# Altium PCB Near-E-Field-Probe.PcbDoc
Units mil, origin at the board's own origin, x right, y up, seen from the top; angles counter-clockwise.
Board outline 3953.32 x 549.98 mil, 4 copper layers (Top Layer, Layer 1, Layer 2, Bottom Layer), stack 61.811 mil thick; 1 components, 2 nets, 5 pads, 446 vias.
Unrouted connection lines stored in the file: 8.
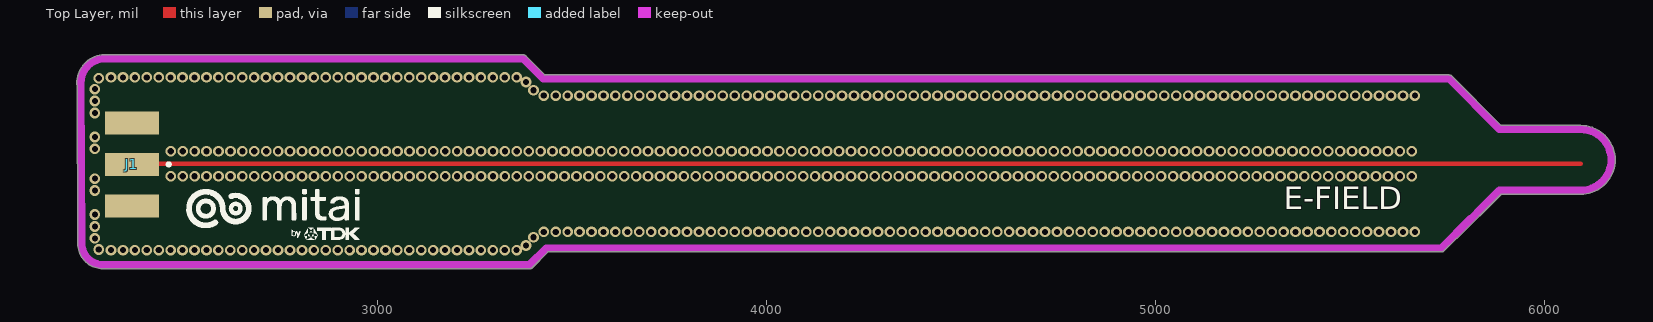
[diagram p0: Top Layer view]
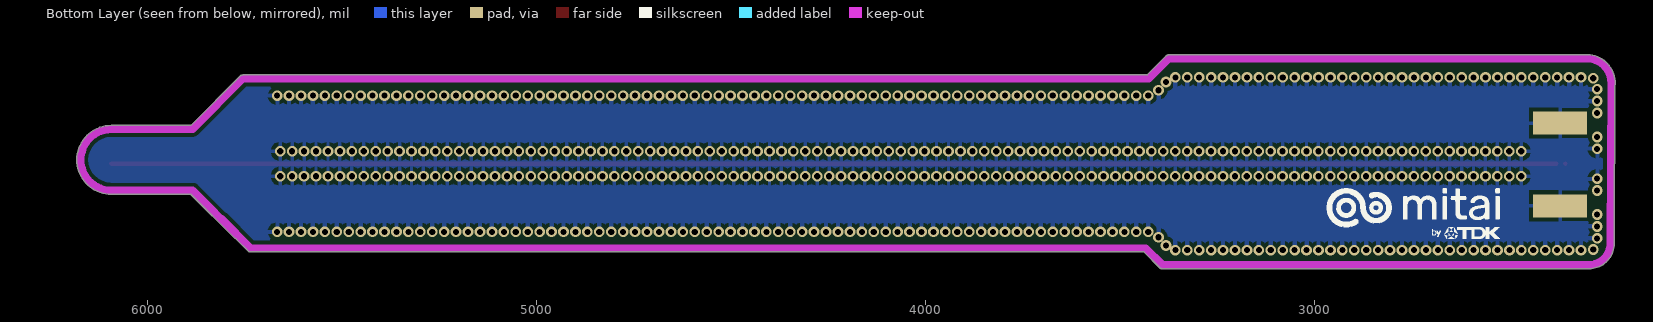
[diagram p1: Bottom Layer view, seen from below]

## Layer stack, top to bottom
Top Solder: solder mask 0.5, Solder Resist, Dk 3.5
Top Layer: signal copper 1.378
Dielectric 2: prepreg 7.874, PP-006, Dk 4.1
Layer 1: signal copper 0.689
Dielectric 1: dielectric 41.9291, FR-4, Dk 4.8
Layer 2: signal copper 0.689
Dielectric 3: prepreg 7.874, PP-006, Dk 4.1
Bottom Layer: signal copper 1.378
Bottom Solder: solder mask 0.5, Solder Resist, Dk 3.5

## Board outline
2300.67,3201.94 2684.47,3201.64 3391.5,3201.64 ccw(c3391.5,3211.5) 3398.47,3204.53 3398.46,3204.52 3439.08,3245.14 5735,3245.14 ccw(c5735,3255) 5741.97,3248.03 5741.96,3248.02 5771.28,3277.34 5775.09,3279.71 5888.71,3393.32 6091.41,3393.32 6093.06,3393.18 ccw(c6093.06,3481.78) 6181.66,3481.78 ccw(c6093.06,3481.78) 6093.14,3570.38 6093.06,3570.38 5888.57,3570.38 5761.95,3696.99 5761.96,3696.98 ccw(c5754.99,3690.01) 5754.99,3699.87 3432.23,3699.87 3431.35,3699.83 3382.45,3748.74 3382.46,3748.73 ccw(c3375.49,3741.76) 3375.49,3751.62 2293.65,3751.62 2292.48,3751.54 ccw(c2301.15,3679.24) 2228.78,3671.15 2230.8,3271.76 2230.8,3266.81 ccw(c2295.67,3266.81)

## Design rules (kind name [scope] priority, off if disabled: settings)
Clearance [All] p1: gap=10 ignorepadtopadclearanceinfootprint=FALSE except(0: Arc-Hole Track-Hole SMDPad-Hole THPad-Hole Via-Hole Fill-Hole Poly-Hole Region-Hole Text-Hole)
PolygonConnect [All] p1: connectstyle=Relief reliefconductorwidth=10 reliefentries=4 polygonreliefangle="90 Angle" airgapwidth=10
RoutingVias [All] p1: holewidth=28 width=50 viastyle="Through Hole" minholewidth=28 minwidth=50 maxholewidth=28 maxwidth=50
SolderMaskExpansion [All] p1: expansion=4 istentingtop=FALSE
Width [All] p1: maxlimit=10 minlimit=10 preferedwidth=10
30 further rules are at their usual default settings.

## Components (designator, comment, footprint, x,y, rotation, side; value= is the part's Value field where it differs from the comment)
J1 "CON-SMA-EDGE-S" RFSOLUTIONS_CON-SMA-EDGE-S 2370,3470 r0 top

## Footprints (in the part's own frame and the unit in brackets; to place one, negate y for a bottom-side part, rotate by r counter-clockwise, add the part's x,y. Pads: shape width x height; smd on the part's side, far side on the other; paste and mask are expansions set on the pad)
RFSOLUTIONS_CON-SMA-EDGE-S [mm]
  rect 3.5x1.5 smd: 1(0,0) G1(0,2.7) G2(0,-2.7)
  rect 3.5x1.5 smd far side: G3(0,2.7) G4(0,-2.7)
  silkscreen extent 2.3,-0.1 2.5,0.1, body extent -11.27,-3.17 2.06,3.17, height 3.55

## Part data
J1: "SMA Connector Jack, Female Socket - Board Edge, End Launch Solder", Package=None, Check_prices=https://www.snapeda.com/parts/CON-SMA-EDGE-S/RF+Solutions/view-part/?ref=eda, Digi-Key_Part_Number=CON-SMA-EDGE-S-ND, MF="RF Solutions", MP=CON-SMA-EDGE-S, Purchase-URL=https://pricing.snapeda.com/search/part/CON-SMA-EDGE-S/?ref=eda, SnapEDA_Link=https://www.snapeda.com/parts/CON-SMA-EDGE-S/RF+Solutions/view-part/?ref=snap

## Via types
v1: diameter 27.56, hole 15.75, Top Layer to Bottom Layer, tented both sides, 446 vias

## Nets (pads, with @x,y where several pads share a name; then routed paths per layer and width w, separated by ;. In a path a pad name is that pad's centre, name@x,y a point inside that pad or via, vN(x,y) a via of type N, cw(c..) or ccw(c..) an arc to the next point about the centre after c; other vN are vias at no path point)
GND: J1.G1 J1.G2 J1.G3 J1.G4
  other v1: 2316,3249.78 2346.67,3249.78 2377.33,3249.78 2408,3249.78 2438.66,3249.78 2469.33,3249.78 2500,3249.78 2530.66,3249.78 2561.33,3249.78 2592,3249.78 2622.66,3249.78 2653.33,3249.78 2684,3249.78 2714.66,3249.78 2745.33,3249.78 2776,3249.78 2806.66,3249.78 2837.33,3249.78 2868,3249.78 2898.66,3249.78 2929.33,3249.78 2960,3249.78 2990.66,3249.78 3021.33,3249.78 3052,3249.78 3082.66,3249.78 3113.33,3249.78 3113.33,3249.78 3144,3249.78 3174.66,3249.78 3205.33,3249.78 3236,3249.78 3266.66,3249.78 3297.33,3249.78 3328,3249.78 3358.66,3249.78 2284.48,3251.5 3382.66,3261.78 2274.66,3280.11 3401.66,3282.78 3428.33,3296.78 3459,3296.78 3489.66,3296.78 3520.33,3296.78 3551,3296.78 3581.66,3296.78 3612.33,3296.78 3643,3296.78 3673.66,3296.78 3704.33,3296.78 3735,3296.78 3765.66,3296.78 3796.33,3296.78 3826.99,3296.78 3857.66,3296.78 3888.33,3296.78 3918.99,3296.78 3949.66,3296.78 3980.33,3296.78 4010.99,3296.78 4041.66,3296.78 4072.33,3296.78 4102.99,3296.78 4133.66,3296.78 4164.33,3296.78 4194.99,3296.78 4225.66,3296.78 4256.33,3296.78 4286.99,3296.78 4317.66,3296.78 4348.33,3296.78 4378.99,3296.78 4409.66,3296.78 4440.33,3296.78 4470.99,3296.78 4501.66,3296.78 4532.33,3296.78 4562.99,3296.78 4593.66,3296.78 4624.33,3296.78 4654.99,3296.78 4685.66,3296.78 4716.33,3296.78 4746.99,3296.78 4777.66,3296.78 4808.33,3296.78 4838.99,3296.78 4869.66,3296.78 4900.33,3296.78 4930.99,3296.78 4961.66,3296.78 4992.33,3296.78 5022.99,3296.78 5053.66,3296.78 5084.33,3296.78 5114.99,3296.78 5145.66,3296.78 5176.33,3296.78 5206.99,3296.78 5237.66,3296.78 5268.33,3296.78 5298.99,3296.78 5329.66,3296.78 5360.32,3296.78 5390.99,3296.78 5421.66,3296.78 5452.32,3296.78 5482.99,3296.78 5513.66,3296.78 5544.32,3296.78 5574.99,3296.78 5605.66,3296.78 5636.32,3296.78 5666.99,3296.78 2274.66,3310.78 2274.66,3341.45 2274.66,3402.78 2274.66,3433.45 2469.66,3439.78 2500.33,3439.78 2531,3439.78 2561.66,3439.78 2592.33,3439.78 2623,3439.78 2653.66,3439.78 2684.33,3439.78 2715,3439.78 2745.66,3439.78 2776.33,3439.78 2807,3439.78 2837.66,3439.78 2868.33,3439.78 2899,3439.78 2929.66,3439.78 2960.33,3439.78 2991,3439.78 3021.66,3439.78 3052.33,3439.78 3083,3439.78 3113.66,3439.78 3144.33,3439.78 3175,3439.78 3205.66,3439.78 3236.33,3439.78 3267,3439.78 3297.66,3439.78 3328.33,3439.78 3359,3439.78 3389.66,3439.78 3420.33,3439.78 3451,3439.78 3481.66,3439.78 3512.33,3439.78 3543,3439.78 3573.66,3439.78 3604.33,3439.78 3635,3439.78 3665.66,3439.78 3696.33,3439.78 3727,3439.78 3757.66,3439.78 3788.33,3439.78 3818.99,3439.78 3849.66,3439.78 3880.33,3439.78 3910.99,3439.78 3941.66,3439.78 3972.33,3439.78 4002.99,3439.78 4033.66,3439.78 4064.33,3439.78 4094.99,3439.78 4125.66,3439.78 4156.33,3439.78 4186.99,3439.78 4217.66,3439.78 4248.33,3439.78 4278.99,3439.78 4309.66,3439.78 4340.33,3439.78 4370.99,3439.78 4401.66,3439.78 4432.33,3439.78 4462.99,3439.78 4493.66,3439.78 4524.33,3439.78 4554.99,3439.78 4585.66,3439.78 4616.33,3439.78 4646.99,3439.78 4677.66,3439.78 4708.33,3439.78 4738.99,3439.78 4769.66,3439.78 4800.33,3439.78 4830.99,3439.78 4861.66,3439.78 4892.33,3439.78 4922.99,3439.78 4953.66,3439.78 4984.33,3439.78 5014.99,3439.78 5045.66,3439.78 5076.33,3439.78 5106.99,3439.78 5137.66,3439.78 5168.33,3439.78 5198.99,3439.78 5229.66,3439.78 5260.33,3439.78 5290.99,3439.78 5321.66,3439.78 5352.32,3439.78 5382.99,3439.78 5413.66,3439.78 5444.32,3439.78 5474.99,3439.78 5505.66,3439.78 5536.32,3439.78 5566.99,3439.78 5597.66,3439.78 5628.32,3439.78 5658.99,3439.78 2469.66,3503.78 2500.33,3503.78 2531,3503.78 2561.66,3503.78 2592.33,3503.78 2623,3503.78 2653.66,3503.78 2684.33,3503.78 2715,3503.78 2745.66,3503.78 2776.33,3503.78 2807,3503.78 2837.66,3503.78 2868.33,3503.78 2899,3503.78 2929.66,3503.78 2960.33,3503.78 2991,3503.78 3021.66,3503.78 3052.33,3503.78 3083,3503.78 3113.66,3503.78 3144.33,3503.78 3175,3503.78 3205.66,3503.78 3236.33,3503.78 3267,3503.78 3297.66,3503.78 3328.33,3503.78 3359,3503.78 3389.66,3503.78 3420.33,3503.78 3451,3503.78 3481.66,3503.78 3512.33,3503.78 3543,3503.78 3573.66,3503.78 3604.33,3503.78 3635,3503.78 3665.66,3503.78 3696.33,3503.78 3727,3503.78 3757.66,3503.78 3788.33,3503.78 3818.99,3503.78 3849.66,3503.78 3880.33,3503.78 3910.99,3503.78 3941.66,3503.78 3972.33,3503.78 4002.99,3503.78 4033.66,3503.78 4064.33,3503.78 4094.99,3503.78 4125.66,3503.78 4156.33,3503.78 4186.99,3503.78 4217.66,3503.78 4248.33,3503.78 4278.99,3503.78 4309.66,3503.78 4340.33,3503.78 4370.99,3503.78 4401.66,3503.78 4432.33,3503.78 4462.99,3503.78 4493.66,3503.78 4524.33,3503.78 4554.99,3503.78 4585.66,3503.78 4616.33,3503.78 4646.99,3503.78 4677.66,3503.78 4708.33,3503.78 4738.99,3503.78 4769.66,3503.78 4800.33,3503.78 4830.99,3503.78 4861.66,3503.78 4892.33,3503.78 4922.99,3503.78 4953.66,3503.78 4984.33,3503.78 5014.99,3503.78 5045.66,3503.78 5076.33,3503.78 5106.99,3503.78 5137.66,3503.78 5168.33,3503.78 5198.99,3503.78 5229.66,3503.78 5260.33,3503.78 5290.99,3503.78 5321.66,3503.78 5352.32,3503.78 5382.99,3503.78 5413.66,3503.78 5444.32,3503.78 5474.99,3503.78 5505.66,3503.78 5536.32,3503.78 5566.99,3503.78 5597.66,3503.78 5628.32,3503.78 5658.99,3503.78 2274.66,3510.11 2274.66,3540.78 2274.66,3602.11 2274.66,3632.78 3428.33,3646.78 3459,3646.78 3489.66,3646.78 3520.33,3646.78 3551,3646.78 3581.66,3646.78 3612.33,3646.78 3643,3646.78 3673.66,3646.78 3704.33,3646.78 3735,3646.78 3765.66,3646.78 3796.33,3646.78 3826.99,3646.78 3857.66,3646.78 3888.33,3646.78 3918.99,3646.78 3949.66,3646.78 3980.33,3646.78 4010.99,3646.78 4041.66,3646.78 4072.33,3646.78 4102.99,3646.78 4133.66,3646.78 4164.33,3646.78 4194.99,3646.78 4225.66,3646.78 4256.33,3646.78 4286.99,3646.78 4317.66,3646.78 4348.33,3646.78 4378.99,3646.78 4409.66,3646.78 4440.33,3646.78 4470.99,3646.78 4501.66,3646.78 4532.33,3646.78 4562.99,3646.78 4593.66,3646.78 4624.33,3646.78 4654.99,3646.78 4685.66,3646.78 4716.33,3646.78 4746.99,3646.78 4777.66,3646.78 4808.33,3646.78 4838.99,3646.78 4869.66,3646.78 4900.33,3646.78 4930.99,3646.78 4961.66,3646.78 4992.33,3646.78 5022.99,3646.78 5053.66,3646.78 5084.33,3646.78 5114.99,3646.78 5145.66,3646.78 5176.33,3646.78 5206.99,3646.78 5237.66,3646.78 5268.33,3646.78 5298.99,3646.78 5329.66,3646.78 5360.32,3646.78 5390.99,3646.78 5421.66,3646.78 5452.32,3646.78 5482.99,3646.78 5513.66,3646.78 5544.32,3646.78 5574.99,3646.78 5605.66,3646.78 5636.32,3646.78 5666.99,3646.78 3401.66,3660.78 2274.66,3663.45 3382.66,3681.78 2284.48,3691.5 2316,3693.78 2346.67,3693.78 2377.33,3693.78 2408,3693.78 2438.66,3693.78 2469.33,3693.78 2500,3693.78 2530.66,3693.78 2561.33,3693.78 2592,3693.78 2622.66,3693.78 2653.33,3693.78 2684,3693.78 2714.66,3693.78 2745.33,3693.78 2776,3693.78 2806.66,3693.78 2837.33,3693.78 2868,3693.78 2898.66,3693.78 2929.33,3693.78 2960,3693.78 2990.66,3693.78 3021.33,3693.78 3052,3693.78 3082.66,3693.78 3113.33,3693.78 3113.33,3693.78 3144,3693.78 3174.66,3693.78 3205.33,3693.78 3236,3693.78 3266.66,3693.78 3297.33,3693.78 3328,3693.78 3358.66,3693.78
PROBE: J1.1
copper on no net: | length 3713.6
  Top Layer w11.55: 2379.48,3471.78 5765.66,3471.78 6093.06,3471.78

## Polygon pours and split planes (outlines as drawn)
GND on Bottom Layer "GND_L04_P000" (solid, pour order 0): 3351.99,3751.62 2270.03,3751.61 2228.87,3710.45 2230.62,3307.03 2230.95,3252.74 2240.69,3231.52 2256.39,3215.19 2269.01,3206.72 2288.34,3201.64 2372.17,3201.64 3363.24,3201.64 3395,3201.25 3438.75,3245 5739.08,3245.14 5754.99,3259.6 5869.99,3374.61 5888.57,3393.18 6100.38,3392.56 6120.76,3397.62 6134.6,3402.38 6148.75,3412.09 6162.09,3426.25 6171.78,3441.13 6179,3451.07 6181.51,3476.61 6181.66,3495.76 6177.15,3509.67 6165,3535 6139.76,3558.3 6105.38,3570.38 6100.38,3570 6105,3570 5890,3570 5760,3700 3430,3700 3378.38,3751.62

## Keep-outs
Keep-Out Layer:
  lines w19.68: 2238.63,3671.74 2240.66,3271.81 ; 2240.66,3266.81 ccw(c2295.67,3266.81) 2295.67,3211.8 ; 2293.65,3741.76 3375.49,3741.76 3427.23,3690.01 ; 2300.67,3211.8 2684.48,3211.5 3391.5,3211.5 3435,3255 5735,3255 5810,3330 ; 3432.23,3690.01 5754.99,3690.01 5884.48,3560.52 6093.06,3560.52 cw(c6093.06,3481.78) 6093.06,3403.04 ; 5768.12,3286.68 5884.48,3403.04 ; 5884.48,3403.18 6093.06,3403.18
  lines w19.69: 2238.63,3671.74 cw(c2301.15,3679.24) 2293.65,3741.76

## Silkscreen, mask and mechanical layers (free items; w line width, h text height)
Top Overlay:
  drawing of 16 lines, arcs and shapes, not listed
  text "E-FIELD" at 5330.35,3335 h100
Bottom Overlay:
  drawing of 16 lines, arcs and shapes, not listed